# Altium PCB PCB_V1.0.PcbDoc (part 1 of 3)
Units mil, origin at the board's own origin, x right, y up, seen from the top; angles counter-clockwise.
Board outline 2770.03 x 1450.03 mil, 4 copper layers (Layer 1(SIG), Layer 2(GND), Layer 3(GND), Layer 4(SIG)), stack 61.581 mil thick; 51 components, 42 nets, 232 pads, 371 vias.
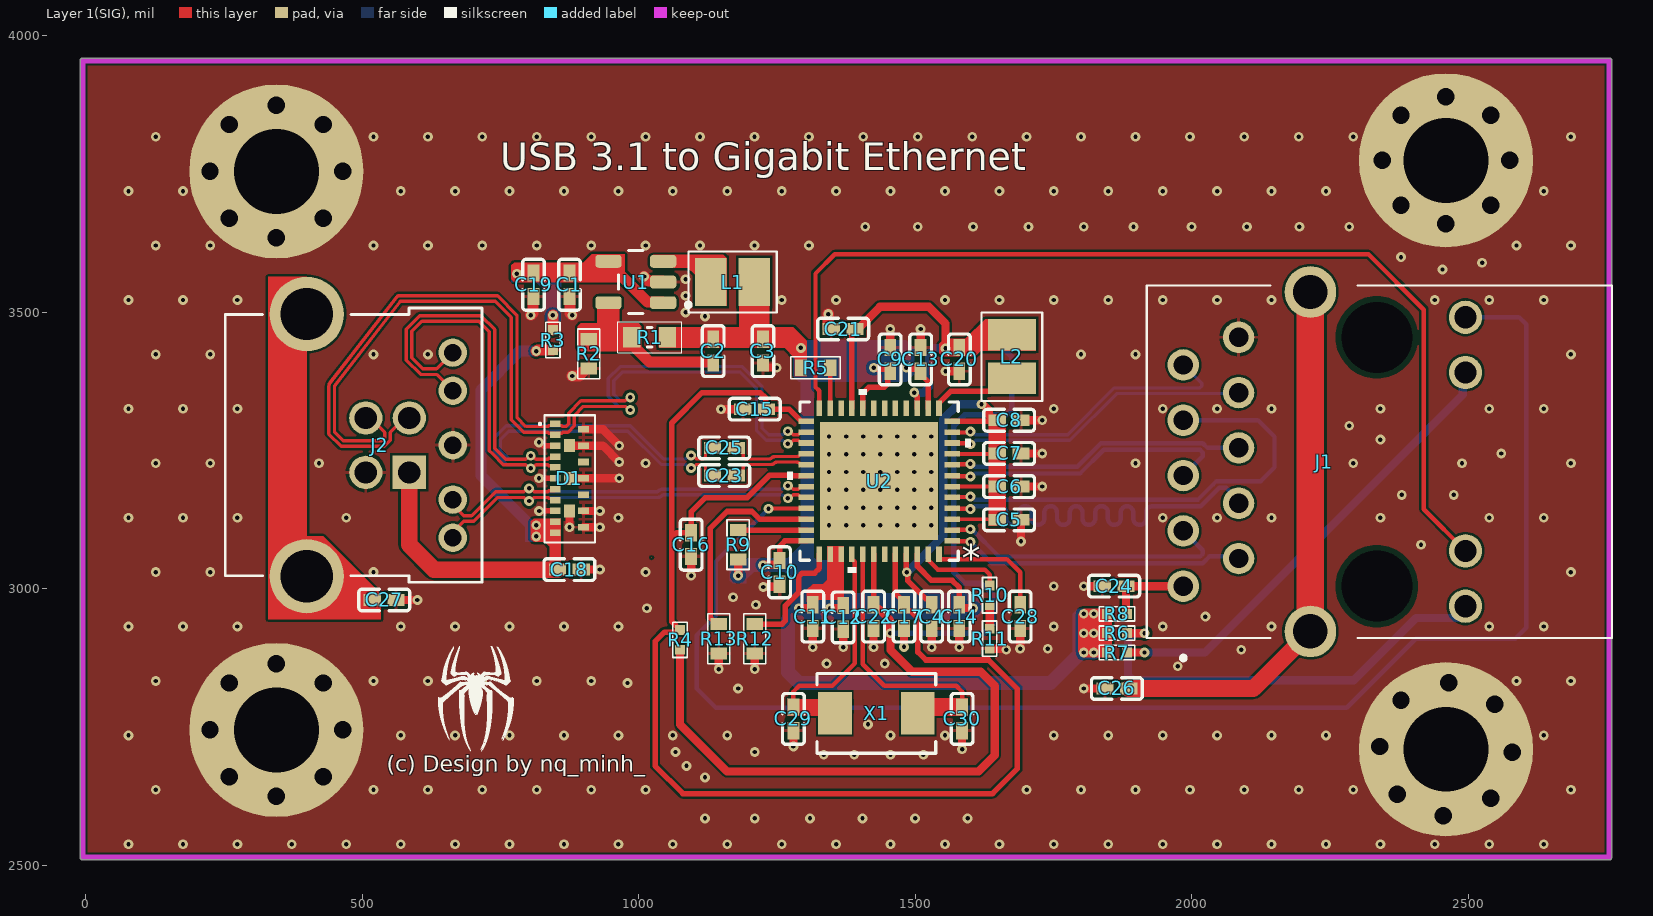
[diagram p0: Layer 1(SIG) view]
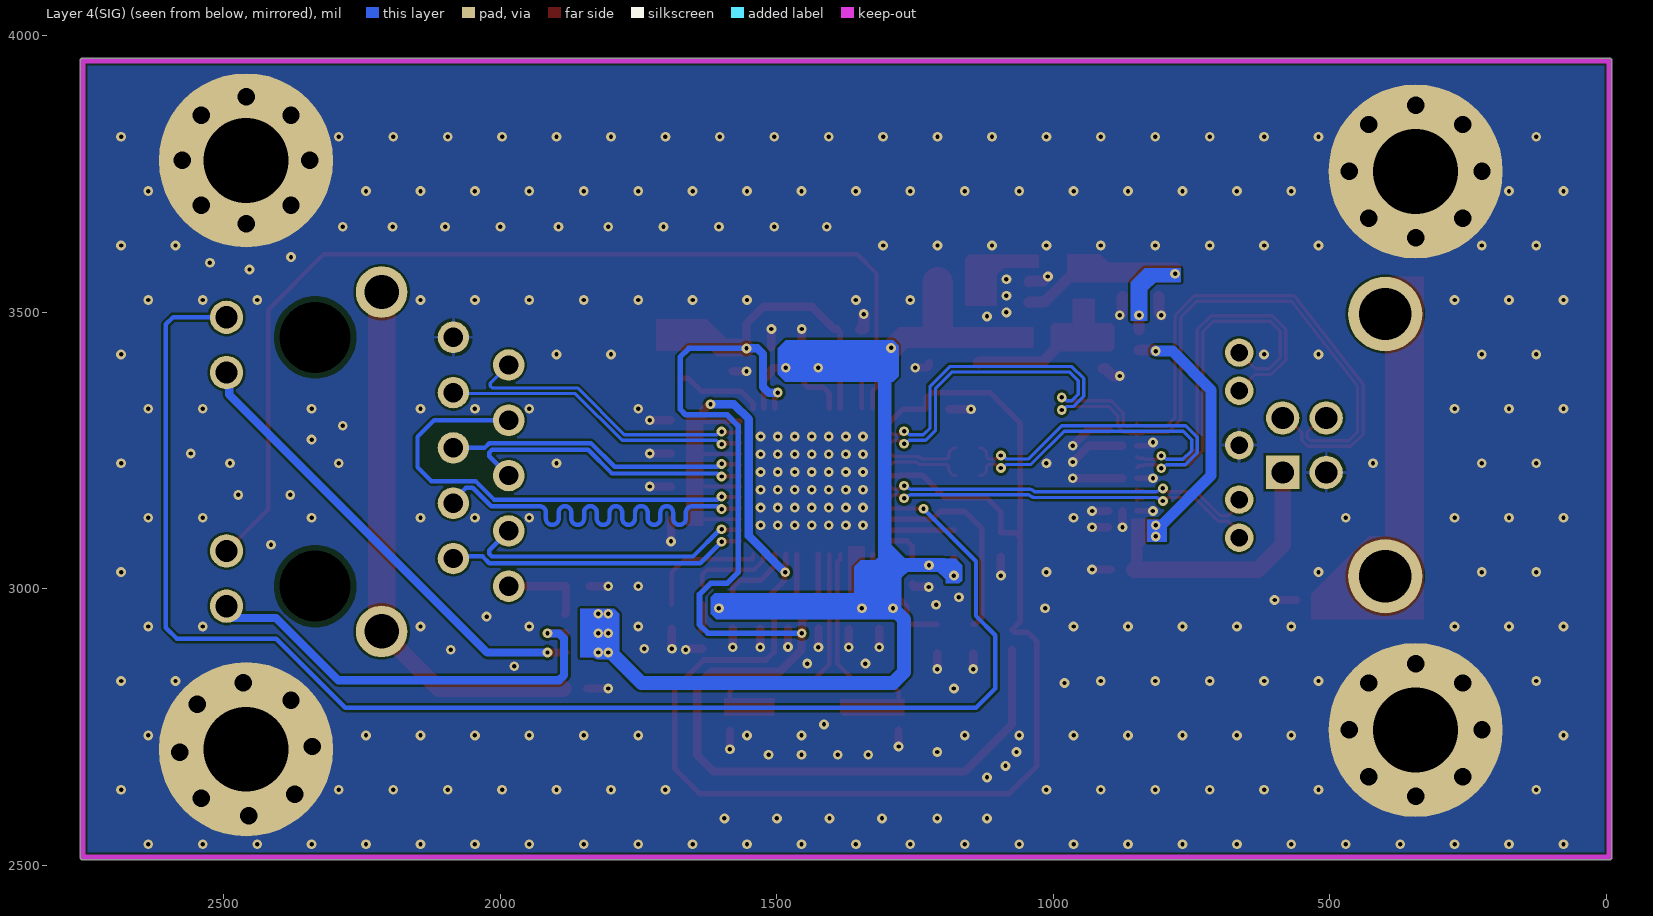
[diagram p1: Layer 4(SIG) view, seen from below]
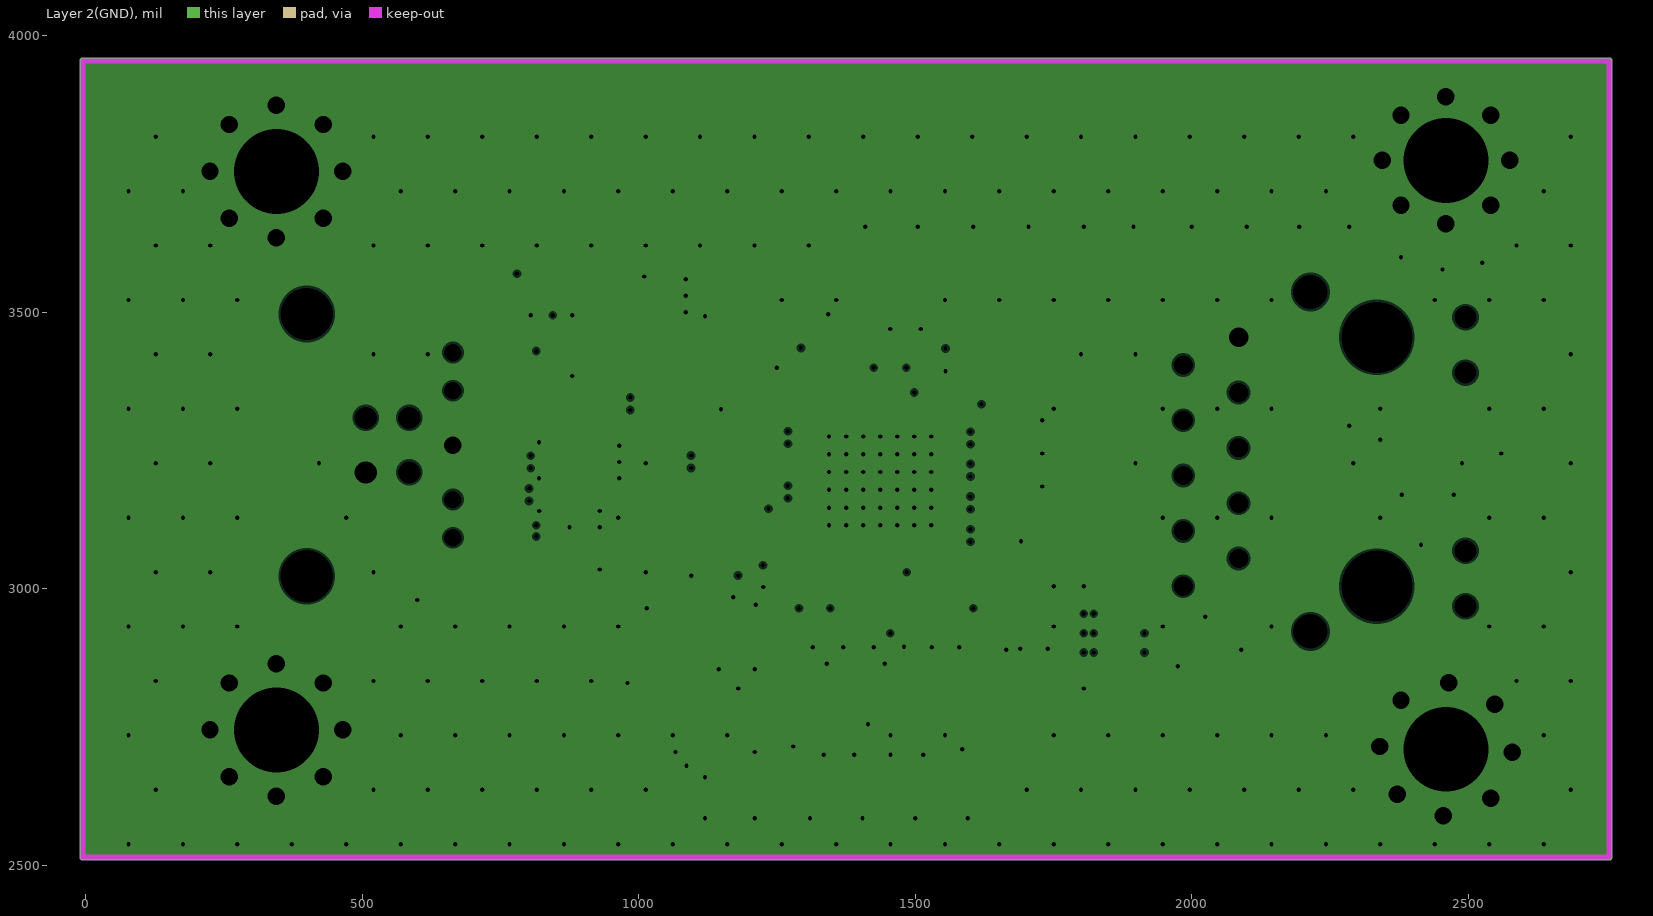
[diagram p2: Layer 2(GND), clearances drawn from the general rule]
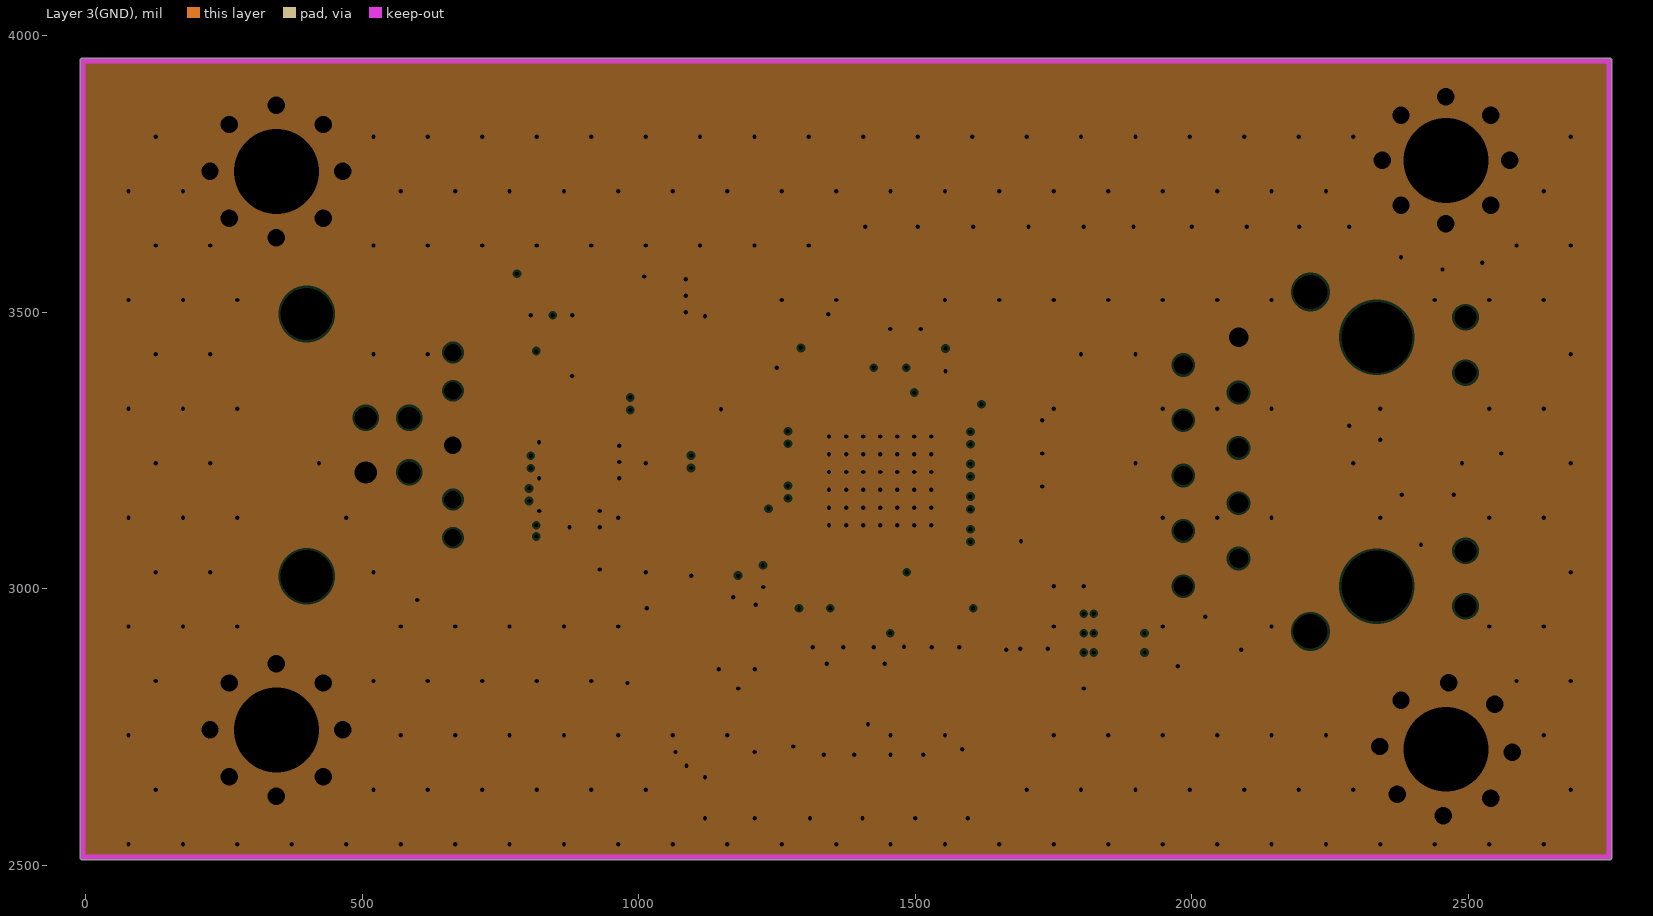
[diagram p3: Layer 3(GND), clearances drawn from the general rule]
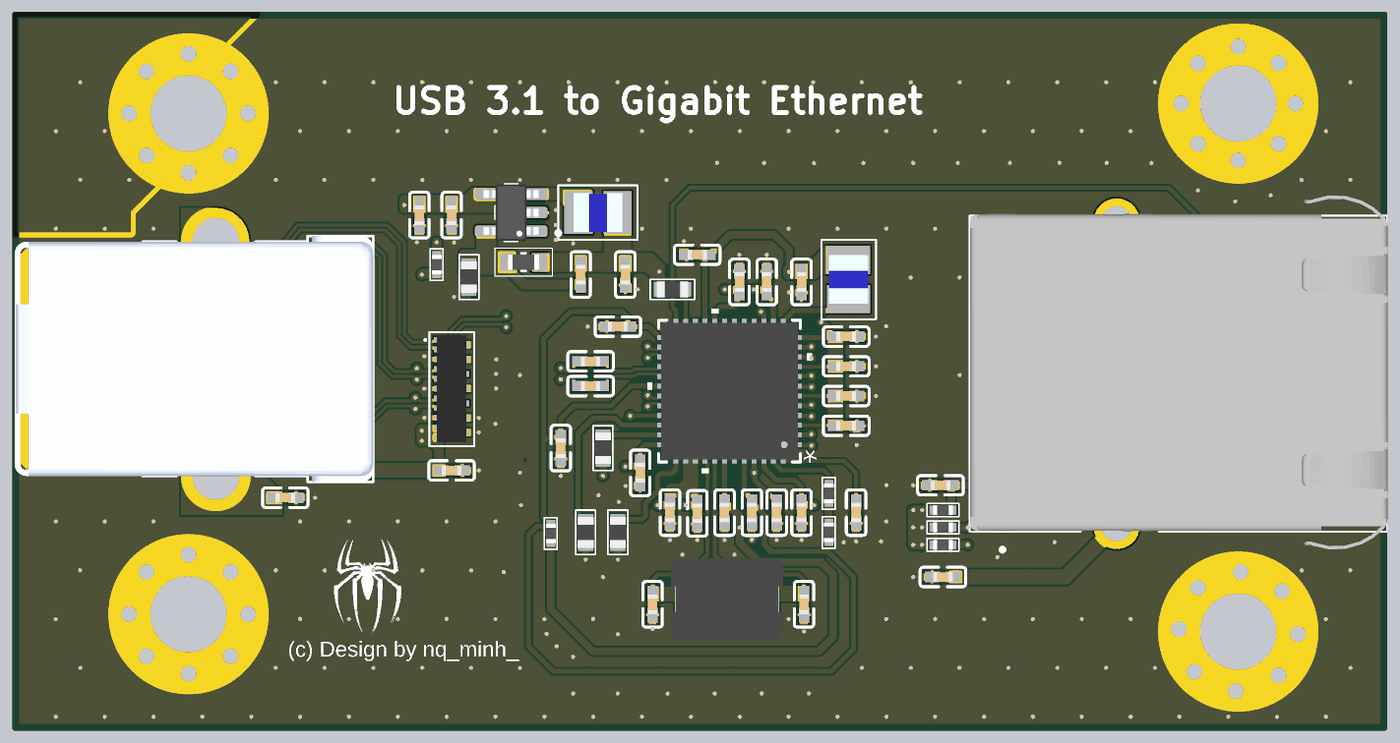
[diagram p4: 3D render of the assembled board from above, using the file's embedded part models]

## Layer stack, top to bottom
Top Solder: solder mask 1, SM-001, Dk 4
Layer 1(SIG): signal copper 1.378
PP1: prepreg 3.913, 3313, Dk 4.1
Layer 2(GND): plane copper 0.598, net GND
C1: dielectric 49.803, FR-4, Dk 4.5
Layer 3(GND): plane copper 0.598, net GND
PP2: prepreg 3.913, 3313, Dk 4.1
Layer 4(SIG): signal copper 1.378
Bottom Solder: solder mask 1, SM-001, Dk 4

## Board outline
-5,2509.99 cw(c-5,2515) -10.01,2515 -10.01,3955 cw(c-5,3955) -5,3960.02 2755,3960.02 cw(c2755,3955) 2760.01,3955 2760.01,2515 cw(c2755,2515) 2755,2509.99

## Design rules (kind name [scope] priority, off if disabled: settings)
BoardOutlineClearance [All] p1: gap=7.87 ignorepadtopadclearanceinfootprint=FALSE
Clearance [All] p1: gap=4 ignorepadtopadclearanceinfootprint=FALSE except(5: Arc-Via Track-Via SMDPad-Via THPad-Via Via-Via Via-Fill Via-Poly Via-Region Via-Text; 9.84: Arc-Hole Track-Hole SMDPad-Hole THPad-Hole Via-Hole Fill-Hole Poly-Hole Region-Hole Text-Hole)
ComponentClearance [All] p1: gap=4 collisioncheckmode=3 verticalgap=4 showdistances=TRUE
DiffPairsRouting DiffPairsRoutin_Diff100 [InDifferentialPairClass('Diff_100')] p1: maxlimit=20 minlimit=4 mostfreqgap=4 toplayer_minwidth=4 toplayer_maxwidth=71497.94 toplayer_prefwidth=4 bottomlayer_minwidth=4 bottomlayer_maxwidth=71497.94 bottomlayer_prefwidth=4 maxuncoupledlength=500
DiffPairsRouting DiffPairsRoutin_Diff50 [InDifferentialPairClass('Diff_50')] p2: maxlimit=20 minlimit=4 mostfreqgap=4 toplayer_minwidth=4 toplayer_maxwidth=71497.94 toplayer_prefwidth=4 bottomlayer_minwidth=4 bottomlayer_maxwidth=71497.94 bottomlayer_prefwidth=4 maxuncoupledlength=500
Height [All] p1: minheight=0 maxheight=71497.94 prefheight=500
HoleSize [All] p1: absolutevalues=TRUE maxlimit=248.03 minlimit=7.87 maxpercent=80.000 minpercent=20.000
HoleToHoleClearance [All] p1: gap=9.84 allowstackedmicrovias=FALSE
MinimumAnnularRing [All] p1: minimumring=3
MinimumSolderMaskSliver [All] p1: minsoldermaskwidth=0
PlaneClearance [All] p1: clearance=4
PlaneConnect PlaneConnectPowerPads [InPadClass('PowerPads')] p1: planeconnectstyle=Direct reliefexpansion=20 reliefentries=4 reliefconductorwidth=10 reliefairgap=10
PlaneConnect [All] p2: planeconnectstyle=Direct reliefexpansion=11.81 reliefentries=4 reliefconductorwidth=4 reliefairgap=4
PolygonConnect PolygonConnectPowerPads [All vs (InPadClass('PowerPads'))] p1: connectstyle=Direct reliefconductorwidth=10 reliefentries=4 polygonreliefangle="90 Angle" airgapwidth=10
PolygonConnect [All] p2: thpad.connectstyle=Relief thpad.reliefconductorwidth=6 thpad.reliefentries=4 thpad.polygonreliefangle="90 Angle" thpad.airgapwidth=6 smdpad.connectstyle=Relief smdpad.reliefconductorwidth=6 smdpad.reliefentries=4 smdpad.polygonreliefangle="90 Angle" smdpad.airgapwidth=6 via.connectstyle=Direct via.reliefconductorwidth=5 via.reliefentries=4 via.polygonreliefangle="90 Angle" via.airgapwidth=5
RoutingVias [All] p1: holewidth=7.87 width=17.72 viastyle="Through Hole" minholewidth=7.87 minwidth=17.72 maxholewidth=248.03 maxwidth=257.87
SilkToSilkClearance [All] p1: silktosilkclearance=0
SilkToSolderMaskClearance [IsPad] p1: minsilkscreentomaskgap=4 clearancetoexposedcopper=TRUE
SolderMaskExpansion [All] p1: expansion=2.95 istentingtop=FALSE
SupplyNets "Schematic Supply Nets_8" [InNet('GND')] p1: voltage=0.000
SupplyNets "Schematic Supply Nets_7" [InNet('+VBUSF')] p2: voltage=0.000
SupplyNets "Schematic Supply Nets_6" [InNet('+2V5')] p3: voltage=0.000
SupplyNets "Schematic Supply Nets_5" [InNet('+1V2')] p4: voltage=0.000
SupplyNets "Schematic Supply Nets_4" [InNet('+3V3')] p5: voltage=0.000
SupplyNets "Schematic Supply Nets_3" [InNet('+VBUS')] p6: voltage=0.000
SupplyNets "Schematic Supply Nets_2" [InNet('GND_E')] p7: voltage=0.000
SupplyNets "Schematic Supply Nets_1" [InNet('+1V2A')] p8: voltage=0.000
SupplyNets "Schematic Supply Nets" [InNet('GND_U')] p9: voltage=0.000
Width [All] p1: maxlimit=71497.94 minlimit=4 preferedwidth=4
20 further rules are at their usual default settings.

## Classes and differential pairs
differential pair class Diff_50: USB_D USB_RX USB_TX USB_TXC
differential pair class Diff_100: MDI_TR0 MDI_TR1 MDI_TR2 MDI_TR3
differential pair MDI_TR3: +MDI_TR3_P -MDI_TR3_N
differential pair MDI_TR2: +MDI_TR2_P -MDI_TR2_N
differential pair MDI_TR1: +MDI_TR1_P -MDI_TR1_N
differential pair MDI_TR0: +MDI_TR0_P -MDI_TR0_N
differential pair USB_TX: +USB_TX_P -USB_TX_N
differential pair USB_TXC: +USB_TXC_P -USB_TXC_N
differential pair USB_RX: +USB_RX_P -USB_RX_N
differential pair USB_D: +USB_D_P -USB_D_N

## Components (designator, comment, footprint, x,y, rotation, side; value= is the part's Value field where it differs from the comment)
C1 "22µF" C0402 875,3550 r90 top
C2 "12pF" C0402 1135,3430 r90 top
C3 "22µF" C0402 1225,3430 r90 top
C4 "1µF" C0402 1530,2950 r270 top
C5 "1µF" C0402 1670,3125 r180 top
C6 "1µF" C0402 1670,3185 r180 top
C7 "1µF" C0402 1670,3245 r180 top
C8 "1µF" C0402 1670,3305 r180 top
C9 "1µF" C0402 1455,3415 r90 top
C10 "1µF" C0402 1255,3030 r270 top
C11 "1µF" C0402 1315,2950 r270 top
C12 "1µF" C0402 1370,2948.54 r270 top
C13 "22µF" C0402 1510,3415 r270 top
C14 "1µF" C0402 1580,2950 r270 top
C15 "1µF" C0402 1210,3325 r180 top
C16 "1µF" C0402 1095,3080 r270 top
C17 "1µF" C0402 1480,2950 r270 top
C18 "1µF" C0402 875,3035 r180 top
C19 "1µF" C0402 810,3550 r90 top
C20 "22µF" C0402 1580,3415 r90 top
C21 "1µF" C0402 1370,3470 r180 top
C22 "1µF" C0402 1425,2950 r270 top
C23 "100nF" C0402 1155,3205 r0 top
C24 "1µF" C0402 1860,3005 r180 top
C25 "100nF" C0402 1155,3255 r0 top
C26 "220pF" C0402 1865,2820 r0 top
C27 "220pF" C0402 540,2980 r180 top
C28 "1µF" C0402 1690,2950 r270 top
C29 "12pF" C0402 1280,2765 r90 top
C30 "12pF" C0402 1585,2765 r90 top
D1 "ESD7008MUTAG" ESD7008MUTAG 875,3200 r270 top value=150fF
J1 "93626-3006" 936263006 1985,3005 r90 top
J2 "GSB4211311WEU" AMPHENOL_GSB4211311WEU 400,3260 r270 top locked
L1 "4.7µH" INDC2520X100N 1170,3555 r0 top
L2 "4.7µH" INDC2520X100N 1675,3420 r90 top
R1 "53.6kΩ" RESC1608X55N 1020,3455 r0 top
R2 "12kΩ" RC0603N_YAG-L 910,3425 r90 top
R3 "0Ω" RC0402N_YAG-L 845,3450 r90 top
R4 "0Ω" RC0402N_YAG-L 1075.04,2908 r90 top
R5 "12kΩ" RC0603N_YAG-L 1320,3400 r180 top
R6 "1kΩ" RC0402N_YAG-L 1865,2920 r180 top
R7 "1kΩ" RC0402N_YAG-L 1865,2885 r180 top
R8 "0Ω" RC0402N_YAG-L 1865,2955 r180 top
R9 "12kΩ" RC0603N_YAG-L 1180,3080 r270 top
R10 "1kΩ" RC0402N_YAG-L 1635,2988.54 r90 top
R11 "1kΩ" RC0402N_YAG-L 1635,2910 r90 top
R12 "12kΩ" RC0603N_YAG-L 1210,2910 r270 top
R13 "12kΩ" RC0603N_YAG-L 1145,2910 r270 top
U1 "TLV62568DBVR" SOT95P280X145-5N 995,3555 r180 top
U2 "LAN7800-I/Y9X 48-Pin VQFN EP Tray" SQFN48_7X7_Y9X_MCH-L 1435,3195 r180 top
X1 "ABM3-25.000MHZ-D2Y-T 25Mhz" XTAL_ABM3_ABR-L 1430,2775 r0 top

## Footprints (in the part's own frame and the unit in brackets; to place one, negate y for a bottom-side part, rotate by r counter-clockwise, add the part's x,y. Pads: shape width x height; smd on the part's side, far side on the other; paste and mask are expansions set on the pad)
936263006 [mm]
  round 1.446 hole 0.89: 1(0,0) 2(1.27,-2.54) 3(2.54,0) 4(3.81,-2.54) 5(5.08,0) 6(6.35,-2.54) 7(7.62,0) 8(8.89,-2.54) 9(10.16,0) 10(11.43,-2.54)
  round 1.53 hole 1.02: 11(-0.92,-12.96) 12(1.62,-12.96) 13(9.81,-12.96) 14(12.35,-12.96)
  round 2.37 hole 1.58: MH1(-2.08,-5.84) MH2(13.51,-5.84)
  round 1.63 hole 3.26 unplated: MH3(11.43,-8.89) MH4(0,-8.89)
  silkscreen extent -3.4,-19.69 13.81,1.68, body extent -3.3,-19.7 14.86,1.67, height 15.2
AMPHENOL_GSB4211311WEU [mm]
  rect 1.53x1.53 / inner round 1.53 / far side rect 1.53x1.53 hole 1.02: 1(1.25,4.71)
  round 1.53 hole 1.02: 2(-1.25,4.71) 3(-1.25,2.71) 4(1.25,2.71)
  round 1.308 hole 0.8: 5(-4.25,6.71) 6(-2.5,6.71) 7(0,6.71) 8(2.5,6.71) 9(4.25,6.71)
  round 3.416 hole 2.4: S1(-6.02,0) S2(6.02,0)
  silkscreen extent -6.3,-3.75 6.3,8.05, body extent -6.3,-10.3 6.3,8.06, height 13.11
C0402 [mm]
  rect 0.79x0.54 smd paste+0 mask+0.051: 1(-0.545,0) 2(0.545,0)
  silkscreen extent -1.17,-0.5 1.17,0.5, body extent -0.5,-0.25 0.5,0.25, height 0.5
ESD7008MUTAG [mm]
  rect 0.3x0.5 smd: 1(-2.5,-0.65) 2(-2,-0.65) 3(-1.5,-0.65) 4(-1,-0.65) 5(-0.5,-0.65) 6(0,-0.65) 7(0.5,-0.65) 8(1,-0.65) 9(1.5,-0.65) 10(2,-0.65) 11(2.5,-0.65) 12(2.25,0.65) 13(1.5,0.65) 14(0.75,0.65) 15(0,0.65) 16(-0.75,0.65) 17(-1.5,0.65) 18(-2.25,0.65)
  rect 0.6x0.5 smd: 19(-1.5,0) 20(0,0) 21(1.5,0)
  silkscreen extent -2.9,-1.4 2.95,1.17, body extent -2.75,-0.76 2.75,0.76, height 0.51
INDC2520X100N [mm]
  rect 1.45x2.2 smd: 1(-1,0) 2(1,0)
  silkscreen extent -2.03,-1.4 2.03,1.4, body extent -1.25,-1 1.25,1, height 1
RC0402N_YAG-L [mil]
  rect 18x18 smd paste+0 mask+0: 1(-18,0) 2(18,0)
  silkscreen extent -32,-13 32,13, body extent -20,-10 20,10, height 14
RC0603N_YAG-L [mil]
  rect 22x30 smd paste+0 mask+0: 1(-26.5,0) 2(26.5,0)
  silkscreen extent -45,-20 45,20, body extent -31,-16 31,16, height 28
RESC1608X55N [mm]
  rect 0.79x0.93 smd paste+0 mask+0.102: 1(-0.82,0) 2(0.82,0)
  silkscreen extent -1.47,-0.71 1.47,0.71, body extent -0.8,-0.4 0.8,0.4, height 0.55
SOT95P280X145-5N [mm]
  rrect50% 1.21x0.59 smd: 1(-1.255,0.95) 2(-1.255,0) 3(-1.255,-0.95) 4(1.255,-0.95) 5(1.255,0.95)
  silkscreen extent -2.51,-1.45 0.8,1.45, body extent -1.4,-1.45 1.4,1.45, height 1.45
SQFN48_7X7_Y9X_MCH-L [mil]
  rect 28x10 smd paste+0 mask+0: 1(-132,108.27) 2(-132,88.58) 3(-132,68.9) 4(-132,49.21) 5(-132,29.53) 6(-132,9.84) 7(-132,-9.84) 8(-132,-29.53) 9(-132,-49.21) 10(-132,-68.9) 11(-132,-88.58) 12(-132,-108.27) 25(132,-108.27) 26(132,-88.58) 27(132,-68.9) 28(132,-49.21) 29(132,-29.53) 30(132,-9.84) 31(132,9.84) 32(132,29.53) 33(132,49.21) 34(132,68.9) 35(132,88.58) 36(132,108.27)
  rect 10x28 smd paste+0 mask+0: 13(-108.27,-132) 14(-88.58,-132) 15(-68.9,-132) 16(-49.21,-132) 17(-29.53,-132) 18(-9.84,-132) 19(9.84,-132) 20(29.53,-132) 21(49.21,-132) 22(68.9,-132) 23(88.58,-132) 24(108.27,-132) 37(108.27,132) 38(88.58,132) 39(68.9,132) 40(49.21,132) 41(29.53,132) 42(9.84,132) 43(-9.84,132) 44(-29.53,132) 45(-49.21,132) 46(-68.9,132) 47(-88.58,132) 48(-108.27,132)
  rect 213x213 smd paste-106.5 mask+0: 49(0,0)
  silkscreen extent -166,-166 166,166, body extent -138,-138 138,138, height 39
XTAL_ABM3_ABR-L [mil]
  rect 61x77 smd paste+0 mask+0: 1(-75,0) 2(75,0)
  silkscreen extent -108,-72 108,72, body extent -113,-82 113,82, height 51

## Part data
C1 C3 C13 C20: library part C0402_MLCC_22uF_X5R_6.3V, "6.3V 22uF X5R ±20% 0402 Multilayer Ceramic Capacitors MLCC - SMD/SMT ROHS", Case/Package=0402, Dielectric=X5R, Dielectric Material=Ceramic, LCSC Part=C415703, Manufacturer=Murata, Manufacturer Part Number=GRM155R60J226ME11D, Max Operating Temperature=85°C, Min Operating Temperature=-55°C, Supplier Part Number=490-GRM155R60J226ME11DDKR-ND, Tolerance=20%, Voltage Rating (DC)=6.3V, Category="Ceramic Capacitors", ComponentLink1Description=https://datasheet.octopart.com:443/GRM155R60J226ME11D-Murata-datasheet-165579666.pdf?src-supplier=TME, ComponentLink1URL=https://datasheet.octopart.com:443/GRM155R60J226ME11D-Murata-datasheet-165579666.pdf?src-supplier=TME, ComponentLink2Description=https://datasheet.octopart.com:443/GRM155R60J226ME11D-Murata-datasheet-102370999.pdf?src-supplier=HQonline, ComponentLink2URL=https://datasheet.octopart.com:443/GRM155R60J226ME11D-Murata-datasheet-102370999.pdf?src-supplier=HQonline, ComponentLink3Description=https://datasheet.octopart.com/GRM155R60J226ME11D-Murata-datasheet-12515295.pdf, ComponentLink3URL=https://datasheet.octopart.com/GRM155R60J226ME11D-Murata-datasheet-12515295.pdf, ComponentLink4Description=https://datasheet.octopart.com/GRM155R60J226ME11D-Murata-datasheet-12510076.pdf, ComponentLink4URL=https://datasheet.octopart.com/GRM155R60J226ME11D-Murata-datasheet-12510076.pdf, ComponentLink5Description=https://datasheet.octopart.com/GRM155R60J226ME11D-Murata-datasheet-11978611.pdf, ComponentLink5URL=https://datasheet.octopart.com/GRM155R60J226ME11D-Murata-datasheet-11978611.pdf, ComponentLink6Description=https://datasheet.octopart.com/GRM155R60J226ME11D-Murata-datasheet-10025737.pdf, ComponentLink6URL=https://datasheet.octopart.com/GRM155R60J226ME11D-Murata-datasheet-10025737.pdf, ComponentLink7Description=https://datasheet.octopart.com/GRM155R60J226ME11D-Murata-datasheet-8819587.pdf, ComponentLink7URL=https://datasheet.octopart.com/GRM155R60J226ME11D-Murata-datasheet-8819587.pdf, ComponentLink8Description=http://sigma.octopart.com:80/reach_statement/Murata-company-16.pdf?src-supplier=Compliance+Statements, ComponentLink8URL=http://sigma.octopart.com:80/reach_statement/Murata-company-16.pdf?src-supplier=Compliance+Statements, Height=500µm, Length=1mm, Lifecycle Status=Production, Mounting Technology="Surface Mount", Number of Terminals=2, Pricing="1=0,29, 10=0,172, 50=0,125, 100=0,1106, 500=0,08622, 1000=0,0787, 2500=0,07077, 5000=0,06599 (USD)", REACH SVHC=Yes, RoHS=Compliant, Stock=5573, Supplier=DigiKey, Thickness=500µm, Width=500µm
C2 C29 C30: library part C0402_MLCC_12pF_c0G_50V, "50V 12pF C0G ±1% 0402 Multilayer Ceramic Capacitors MLCC - SMD/SMT ROHS", Case/Package=0402, Dielectric Material=Ceramic, LCSC Part=C393682, Manufacturer=Murata, Manufacturer Lifecycle Status="IN PRODUCTION", Manufacturer Part Number=GCM1555C1H120FA16D, Max Operating Temperature=125°C, Min Operating Temperature=-55°C, Ratings=AEC-Q200, Supplier Part Number=490-16460-1-ND, Temperature Coefficient=30ppm/°C, Voltage Rating=50V, Category="Ceramic Capacitors", ComponentLink1Description=https://datasheet.octopart.com:443/GCM1555C1H120FA16D-Murata-datasheet-149522307.pdf?src-supplier=Newark, ComponentLink1URL=https://datasheet.octopart.com:443/GCM1555C1H120FA16D-Murata-datasheet-149522307.pdf?src-supplier=Newark, ComponentLink2Description=https://datasheet.octopart.com:443/GCM1555C1H120FA16D-Murata-datasheet-141265818.pdf?src-supplier=Geoflip, ComponentLink2URL=https://datasheet.octopart.com:443/GCM1555C1H120FA16D-Murata-datasheet-141265818.pdf?src-supplier=Geoflip, ComponentLink3Description=https://datasheet.octopart.com:443/GCM1555C1H120FA16D-Murata-datasheet-140655927.pdf?src-supplier=Ciiva, ComponentLink3URL=https://datasheet.octopart.com:443/GCM1555C1H120FA16D-Murata-datasheet-140655927.pdf?src-supplier=Ciiva, ComponentLink4Description=https://datasheet.octopart.com:443/GCM1555C1H120FA16D-Murata-datasheet-138715618.pdf?src-supplier=Ciiva, ComponentLink4URL=https://datasheet.octopart.com:443/GCM1555C1H120FA16D-Murata-datasheet-138715618.pdf?src-supplier=Ciiva, ComponentLink5Description=https://datasheet.octopart.com:443/GCM1555C1H120FA16D-Murata-datasheet-12511495.pdf?src-supplier=TME, ComponentLink5URL=https://datasheet.octopart.com:443/GCM1555C1H120FA16D-Murata-datasheet-12511495.pdf?src-supplier=TME, ComponentLink6Description=http://sigma.octopart.com:80/reach_statement/Murata-company-16.pdf?src-supplier=Compliance+Statements, ComponentLink6URL=http://sigma.octopart.com:80/reach_statement/Murata-company-16.pdf?src-supplier=Compliance+Statements, Export Control Classification Number (ECCN) Code=EAR99, Harmonized Tariff Schedule (HTS) Code=8532.24.00.20, Height=500µm, Introduction Date=2013-11-20, Length=1mm, Lifecycle Status=Production, Material=Ceramic, Mounting Technology="Surface Mount", Number of Terminals=2, Pricing="1=0,1, 10=0,039, 50=0,0262, 100=0,0225, 500=0,01612, 1000=0,01418, 2500=0,01214, 5000=0,01092 (USD)", REACH SVHC=Yes, RoHS=Compliant, Schedule B="8532240020, 8532240020|8532240020|8532240020|8532240020|8532240020", Stock=94279, Supplier=DigiKey, Thickness=500µm, Voltage Rating (DC)=50V, Width=500µm
C4 C5 C6 C7 C8 C9 C10 C11 C12 C14 C15 C16 C17 C18 C19 C21 C22 C24 C28: library part C0402_MLCC_1uF_X5R_50V, "Ceramic Capacitor, Multilayer, Ceramic, 50V, 10% +Tol, 10% -Tol, X5R, 1uF, Surface Mount, 0402", Case/Package=0402, Dielectric=X5R, Dielectric Material=Ceramic, LCSC Part=C1518208, Manufacturer=Murata, Manufacturer Lifecycle Status="IN PRODUCTION", Manufacturer Part Number=GRM155R61H105KE05D, Max Operating Temperature=85°C, Min Operating Temperature=-55°C, Supplier Part Number=490-GRM155R61H105KE05DDKR-ND, Tolerance=10%, Voltage Rating=50V, Category="Ceramic Capacitors", ComponentLink1Description=https://datasheet.octopart.com:443/GRM155R61H105KE05D-Murata-datasheet-155239061.pdf?src-supplier=Newark, ComponentLink1URL=https://datasheet.octopart.com:443/GRM155R61H105KE05D-Murata-datasheet-155239061.pdf?src-supplier=Newark, ComponentLink2Description=https://datasheet.octopart.com:443/GRM155R61H105KE05D-Murata-datasheet-165579666.pdf?src-supplier=TME, ComponentLink2URL=https://datasheet.octopart.com:443/GRM155R61H105KE05D-Murata-datasheet-165579666.pdf?src-supplier=TME, ComponentLink3Description=https://datasheet.octopart.com:443/GRM155R61H105KE05D-Murata-datasheet-192320400.pdf?src-supplier=HQonline, ComponentLink3URL=https://datasheet.octopart.com:443/GRM155R61H105KE05D-Murata-datasheet-192320400.pdf?src-supplier=HQonline, ComponentLink4Description=https://datasheet.octopart.com:443/GRM155R61H105KE05D-Murata-datasheet-141266224.pdf?src-supplier=Ciiva, ComponentLink4URL=https://datasheet.octopart.com:443/GRM155R61H105KE05D-Murata-datasheet-141266224.pdf?src-supplier=Ciiva, ComponentLink5Description=https://datasheet.octopart.com:443/GRM155R61H105KE05D-Murata-datasheet-140690632.pdf?src-supplier=Ciiva, ComponentLink5URL=https://datasheet.octopart.com:443/GRM155R61H105KE05D-Murata-datasheet-140690632.pdf?src-supplier=Ciiva, ComponentLink6Description=https://datasheet.octopart.com:443/GRM155R61H105KE05D-Murata-datasheet-138740814.pdf?src-supplier=Ciiva, ComponentLink6URL=https://datasheet.octopart.com:443/GRM155R61H105KE05D-Murata-datasheet-138740814.pdf?src-supplier=Ciiva, ComponentLink7Description=https://datasheet.octopart.com/GRM155R61H105KE05D-Murata-datasheet-12515295.pdf, ComponentLink7URL=https://datasheet.octopart.com/GRM155R61H105KE05D-Murata-datasheet-12515295.pdf, ComponentLink8Description=https://datasheet.octopart.com/GRM155R61H105KE05D-Murata-datasheet-12510076.pdf, ComponentLink8URL=https://datasheet.octopart.com/GRM155R61H105KE05D-Murata-datasheet-12510076.pdf, ComponentLink9Description=https://datasheet.octopart.com/GRM155R61H105KE05D-Murata-datasheet-11978611.pdf, ComponentLink9URL=https://datasheet.octopart.com/GRM155R61H105KE05D-Murata-datasheet-11978611.pdf, ComponentLink10Description=https://datasheet.octopart.com/GRM155R61H105KE05D-Murata-datasheet-10025737.pdf, ComponentLink10URL=https://datasheet.octopart.com/GRM155R61H105KE05D-Murata-datasheet-10025737.pdf, ComponentLink11Description=https://datasheet.octopart.com/GRM155R61H105KE05D-Murata-datasheet-8819587.pdf, ComponentLink11URL=https://datasheet.octopart.com/GRM155R61H105KE05D-Murata-datasheet-8819587.pdf, ComponentLink12Description=http://sigma.octopart.com:80/reach_statement/Murata-company-16.pdf?src-supplier=Compliance+Statements, ComponentLink12URL=http://sigma.octopart.com:80/reach_statement/Murata-company-16.pdf?src-supplier=Compliance+Statements, Export Control Classification Number (ECCN) Code=EAR99, Harmonized Tariff Schedule (HTS) Code=8532.24.00.20, Height=500µm, Introduction Date=2020-01-27, Length=1mm, Lifecycle Status=Production, Material=Ceramic, Mounting Technology="Surface Mount", Number of Terminals=2, Pricing="1=0,1, 10=0,056, 50=0,0382, 100=0,0329, 500=0,0241, 1000=0,02139, 2500=0,01854, 5000=0,01683 (USD)", REACH SVHC=Yes, RoHS=Compliant, Stock=2290440, Supplier=DigiKey, Thickness=500µm, Voltage Rating (DC)=50V, Width=500µm
C23 C25: library part C0402_MLCC_100nF_X7R_50V, "50V 100nF X7R ±10% 0402 Multilayer Ceramic Capacitors MLCC - SMD/SMT ROHS", Case/Package=0402, Dielectric=X7R, Dielectric Material=Ceramic, LCSC Part=C131394, Manufacturer="Yageo Group", Manufacturer Part Number=CC0402KRX7R9BB104, Max Operating Temperature=125°C, Min Operating Temperature=-55°C, Supplier Part Number=311-3566-6-ND, Temperature Coefficient=30ppm/°C, Tolerance=10%, Voltage Rating=50V, Category="Ceramic Capacitors", China RoHS=Compliant, ComponentLink1Description=https://datasheet.octopart.com:443/CC0402KRX7R9BB104-Yageo-datasheet-177165144.pdf?src-supplier=IHS, ComponentLink1URL=https://datasheet.octopart.com:443/CC0402KRX7R9BB104-Yageo-datasheet-177165144.pdf?src-supplier=IHS, ComponentLink2Description=https://datasheet.octopart.com:443/CC0402KRX7R9BB104-Yageo-datasheet-78855684.pdf?src-supplier=Upverter, ComponentLink2URL=https://datasheet.octopart.com:443/CC0402KRX7R9BB104-Yageo-datasheet-78855684.pdf?src-supplier=Upverter, ComponentLink3Description=https://datasheet.octopart.com:443/CC0402KRX7R9BB104-Yageo-datasheet-181967451.pdf?src-supplier=Newark, ComponentLink3URL=https://datasheet.octopart.com:443/CC0402KRX7R9BB104-Yageo-datasheet-181967451.pdf?src-supplier=Newark, ComponentLink4Description=https://datasheet.octopart.com:443/CC0402KRX7R9BB104-Yageo-datasheet-140260305.pdf?src-supplier=Newark, ComponentLink4URL=https://datasheet.octopart.com:443/CC0402KRX7R9BB104-Yageo-datasheet-140260305.pdf?src-supplier=Newark, ComponentLink5Description=https://datasheet.octopart.com:443/CC0402KRX7R9BB104-Yageo-datasheet-147453679.pdf?src-supplier=Farnell, ComponentLink5URL=https://datasheet.octopart.com:443/CC0402KRX7R9BB104-Yageo-datasheet-147453679.pdf?src-supplier=Farnell, ComponentLink6Description=https://datasheet.octopart.com/CC0402KRX7R9BB104-Yageo-datasheet-10883670.pdf, ComponentLink6URL=https://datasheet.octopart.com/CC0402KRX7R9BB104-Yageo-datasheet-10883670.pdf, ComponentLink7Description=https://datasheet.octopart.com/Surface-Mount-Ceramic-Multilayer-Capacitors%3B-General-Purpose-%26-High-Capacitance-Class-2%2C-X7R-Yageo-datasheet-family-114.pdf, ComponentLink7URL=https://datasheet.octopart.com/Surface-Mount-Ceramic-Multilayer-Capacitors%3B-General-Purpose-%26-High-Capacitance-Class-2%2C-X7R-Yageo-datasheet-family-114.pdf, ComponentLink8Description=https://datasheet.octopart.com:443/CC0402KRX7R9BB104-Yageo-datasheet-166511530.pdf?src-supplier=Future+Electronics, ComponentLink8URL=https://datasheet.octopart.com:443/CC0402KRX7R9BB104-Yageo-datasheet-166511530.pdf?src-supplier=Future+Electronics, ComponentLink9Description=https://datasheet.octopart.com:443/CC0402KRX7R9BB104-Yageo-datasheet-137700082.pdf?src-supplier=Future+Electronics, ComponentLink9URL=https://datasheet.octopart.com:443/CC0402KRX7R9BB104-Yageo-datasheet-137700082.pdf?src-supplier=Future+Electronics, ComponentLink10Description=https://datasheet.octopart.com:443/CC0402KRX7R9BB104-Yageo-datasheet-137700084.pdf?src-supplier=Future+Electronics, ComponentLink10URL=https://datasheet.octopart.com:443/CC0402KRX7R9BB104-Yageo-datasheet-137700084.pdf?src-supplier=Future+Electronics, ComponentLink11Description=https://datasheet.octopart.com:443/CC0402KRX7R9BB104-Yageo-datasheet-42079887.pdf?src-supplier=Future+Electronics, ComponentLink11URL=https://datasheet.octopart.com:443/CC0402KRX7R9BB104-Yageo-datasheet-42079887.pdf?src-supplier=Future+Electronics, ComponentLink12Description=https://datasheet.octopart.com:443/CC0402KRX7R9BB104-Yageo-datasheet-178018857.pdf?src-supplier=Burklin+Elektronik, ComponentLink12URL=https://datasheet.octopart.com:443/CC0402KRX7R9BB104-Yageo-datasheet-178018857.pdf?src-supplier=Burklin+Elektronik, ComponentLink13Description=https://datasheet.octopart.com:443/CC0402KRX7R9BB104-Yageo-Group-datasheet-165992755.pdf?src-supplier=ODG+(Origin+Data+Global), ComponentLink13URL=https://datasheet.octopart.com:443/CC0402KRX7R9BB104-Yageo-Group-datasheet-165992755.pdf?src-supplier=ODG+(Origin+Data+Global), ComponentLink14Description=https://datasheet.octopart.com:443/CC0402KRX7R9BB104-Yageo-datasheet-151948686.pdf?src-supplier=TME, ComponentLink14URL=https://datasheet.octopart.com:443/CC0402KRX7R9BB104-Yageo-datasheet-151948686.pdf?src-supplier=TME, ComponentLink15Description=https://datasheet.octopart.com:443/CC0402KRX7R9BB104-Yageo-datasheet-120101875.pdf?src-supplier=Megastar, ComponentLink15URL=https://datasheet.octopart.com:443/CC0402KRX7R9BB104-Yageo-datasheet-120101875.pdf?src-supplier=Megastar, ComponentLink16Description=http://sigma.octopart.com:80/rohs_statement/Surface-Mount-Ceramic-Multilayer-Capacitors%3B-General-Purpose-%26-High-Capacitance-Class-2%2C-X7R-Yageo-family-124.pdf?src-supplier=Compliance+Statements, ComponentLink16URL=http://sigma.octopart.com:80/rohs_statement/Surface-Mount-Ceramic-Multilayer-Capacitors%3B-General-Purpose-%26-High-Capacitance-Class-2%2C-X7R-Yageo-family-124.pdf?src-supplier=Compliance+Statements, ComponentLink17Description=http://sigma.octopart.com:80/reach_statement/Surface-Mount-Ceramic-Multilayer-Capacitors%3B-General-Purpose-%26-High-Capacitance-Class-2%2C-X7R-Yageo-family-125.pdf?src-supplier=Compliance+Statements, ComponentLink17URL=http://sigma.octopart.com:80/reach_statement/Surface-Mount-Ceramic-Multilayer-Capacitors%3B-General-Purpose-%26-High-Capacitance-Class-2%2C-X7R-Yageo-family-125.pdf?src-supplier=Compliance+Statements, ComponentLink18Description=http://sigma.octopart.com:80/conflict_mineral_statement/Yageo-company-3.pdf?src-supplier=Compliance+Statements, ComponentLink18URL=http://sigma.octopart.com:80/conflict_mineral_statement/Yageo-company-3.pdf?src-supplier=Compliance+Statements, ComponentLink19Description=http://sigma.octopart.com:80/rohs_statement/Yageo-company-2.pdf?src-supplier=Compliance+Statements, ComponentLink19URL=http://sigma.octopart.com:80/rohs_statement/Yageo-company-2.pdf?src-supplier=Compliance+Statements, Halogen Free="Halogen Free", Height=500µm, Lead Free="Lead Free", Length=1mm, Lifecycle Status=Production, Material=Ceramic, Mounting Technology="Surface Mount", Number of Terminals=2, Pricing="1=0,1, 10=0,055, 50=0,0382, 100=0,0329, 500=0,02408, 1000=0,02136, 2500=0,01852, 5000=0,01681 (USD)", REACH SVHC=Yes, RoHS=Compliant, Schedule B="8532240020, 8532240020|8532240020, 8532240020|8532240020|8532240020, 8532240020|8532240020|8532240020|8532240020", Stock=2445691, Supplier=DigiKey, Thickness=558.8µm, Voltage Rating (DC)=50V, Width=500µm
C26 C27: library part C0402_MLCC_220pF_C0G_50V, "50V 220pF C0G ±5% 0402 Multilayer Ceramic Capacitors MLCC - SMD/SMT ROHS", Case Code (Imperial)=0402, Case Code (Metric)=1005, Dielectric=C0G, Dielectric Material=Ceramic, Insulation Resistance=10GΩ, LCSC Part=C71693, Manufacturer=Murata, Manufacturer Lifecycle Status=NRND, Manufacturer Part Number=GRM1555C1H221JA01D, Max Operating Temperature=125°C, Min Operating Temperature=-55°C, Supplier Part Number=490-1293-6-ND, Temperature Coefficient=30ppm/°C, Tolerance=5%, Voltage=50V, Case/Package=0402, Category="Ceramic Capacitors", ComponentLink1Description=https://datasheet.octopart.com:443/GRM1555C1H221JA01D-Murata-datasheet-501912.pdf?src-supplier=element14+APAC, ComponentLink1URL=https://datasheet.octopart.com:443/GRM1555C1H221JA01D-Murata-datasheet-501912.pdf?src-supplier=element14+APAC, ComponentLink2Description=https://datasheet.octopart.com:443/GRM1555C1H221JA01D-Murata-datasheet-62320221.pdf?src-supplier=element14+APAC, ComponentLink2URL=https://datasheet.octopart.com:443/GRM1555C1H221JA01D-Murata-datasheet-62320221.pdf?src-supplier=element14+APAC, ComponentLink3Description=https://datasheet.octopart.com:443/GRM1555C1H221JA01D-Murata-datasheet-165579666.pdf?src-supplier=TME, ComponentLink3URL=https://datasheet.octopart.com:443/GRM1555C1H221JA01D-Murata-datasheet-165579666.pdf?src-supplier=TME, ComponentLink4Description=https://datasheet.octopart.com:443/GRM1555C1H221JA01D-Murata-datasheet-59876780.pdf?src-supplier=TME, ComponentLink4URL=https://datasheet.octopart.com:443/GRM1555C1H221JA01D-Murata-datasheet-59876780.pdf?src-supplier=TME, ComponentLink5Description=https://datasheet.octopart.com:443/GRM1555C1H221JA01D-Murata-datasheet-141266224.pdf?src-supplier=Ciiva, ComponentLink5URL=https://datasheet.octopart.com:443/GRM1555C1H221JA01D-Murata-datasheet-141266224.pdf?src-supplier=Ciiva, ComponentLink6Description=https://datasheet.octopart.com:443/GRM1555C1H221JA01D-Murata-datasheet-140681357.pdf?src-supplier=Ciiva, ComponentLink6URL=https://datasheet.octopart.com:443/GRM1555C1H221JA01D-Murata-datasheet-140681357.pdf?src-supplier=Ciiva, ComponentLink7Description=https://datasheet.octopart.com:443/GRM1555C1H221JA01D-Murata-datasheet-138739519.pdf?src-supplier=Ciiva, ComponentLink7URL=https://datasheet.octopart.com:443/GRM1555C1H221JA01D-Murata-datasheet-138739519.pdf?src-supplier=Ciiva, ComponentLink8Description=https://datasheet.octopart.com:443/GRM1555C1H221JA01D-Murata-datasheet-120101189.pdf?src-supplier=Megastar, ComponentLink8URL=https://datasheet.octopart.com:443/GRM1555C1H221JA01D-Murata-datasheet-120101189.pdf?src-supplier=Megastar, ComponentLink9Description=https://datasheet.octopart.com:443/GRM1555C1H221JA01D-Murata-datasheet-22122223.pdf?src-supplier=Future+Electronics, ComponentLink9URL=https://datasheet.octopart.com:443/GRM1555C1H221JA01D-Murata-datasheet-22122223.pdf?src-supplier=Future+Electronics, ComponentLink10Description=https://datasheet.octopart.com:443/GRM1555C1H221JA01D-Murata-datasheet-12510170.pdf?src-supplier=Future+Electronics, ComponentLink10URL=https://datasheet.octopart.com:443/GRM1555C1H221JA01D-Murata-datasheet-12510170.pdf?src-supplier=Future+Electronics, ComponentLink11Description=https://datasheet.octopart.com:443/GRM1555C1H221JA01D-Murata-datasheet-8324201.pdf?src-supplier=Future+Electronics, ComponentLink11URL=https://datasheet.octopart.com:443/GRM1555C1H221JA01D-Murata-datasheet-8324201.pdf?src-supplier=Future+Electronics, ComponentLink12Description=https://datasheet.octopart.com:443/GRM1555C1H221JA01D-Murata-datasheet-552801.pdf?src-supplier=Future+Electronics, ComponentLink12URL=https://datasheet.octopart.com:443/GRM1555C1H221JA01D-Murata-datasheet-552801.pdf?src-supplier=Future+Electronics, ComponentLink13Description=https://datasheet.octopart.com:443/GRM1555C1H221JA01D-Murata-datasheet-44105895.pdf?src-supplier=Future+Electronics, ComponentLink13URL=https://datasheet.octopart.com:443/GRM1555C1H221JA01D-Murata-datasheet-44105895.pdf?src-supplier=Future+Electronics, ComponentLink14Description=https://datasheet.octopart.com/GRM1555C1H221JA01D-Murata-datasheet-12515295.pdf, ComponentLink14URL=https://datasheet.octopart.com/GRM1555C1H221JA01D-Murata-datasheet-12515295.pdf, ComponentLink15Description=https://datasheet.octopart.com/GRM1555C1H221JA01D-Murata-datasheet-12510076.pdf, ComponentLink15URL=https://datasheet.octopart.com/GRM1555C1H221JA01D-Murata-datasheet-12510076.pdf, ComponentLink16Description=https://datasheet.octopart.com/GRM1555C1H221JA01D-Murata-datasheet-11978611.pdf, ComponentLink16URL=https://datasheet.octopart.com/GRM1555C1H221JA01D-Murata-datasheet-11978611.pdf, ComponentLink17Description=https://datasheet.octopart.com/GRM1555C1H221JA01D-Murata-datasheet-10025737.pdf, ComponentLink17URL=https://datasheet.octopart.com/GRM1555C1H221JA01D-Murata-datasheet-10025737.pdf, ComponentLink18Description=https://datasheet.octopart.com/GRM1555C1H221JA01D-Murata-datasheet-8819587.pdf, ComponentLink18URL=https://datasheet.octopart.com/GRM1555C1H221JA01D-Murata-datasheet-8819587.pdf, ComponentLink19Description=https://datasheet.octopart.com/GRM1555C1H221JA01D-Murata-datasheet-12544403.pdf, ComponentLink19URL=https://datasheet.octopart.com/GRM1555C1H221JA01D-Murata-datasheet-12544403.pdf, ComponentLink20Description=https://datasheet.octopart.com:443/GRM1555C1H221JA01D-Murata-datasheet-11841991.pdf?src-supplier=Arrow+Electronics, ComponentLink20URL=https://datasheet.octopart.com:443/GRM1555C1H221JA01D-Murata-datasheet-11841991.pdf?src-supplier=Arrow+Electronics, ComponentLink21Description=https://datasheet.octopart.com:443/GRM1555C1H221JA01D-Murata-datasheet-7558141.pdf?src-supplier=Jameco, ComponentLink21URL=https://datasheet.octopart.com:443/GRM1555C1H221JA01D-Murata-datasheet-7558141.pdf?src-supplier=Jameco, ComponentLink22Description=https://datasheet.octopart.com:443/GRM1555C1H221JA01D-Murata-datasheet-148211.pdf?src-supplier=Garrett, ComponentLink22URL=https://datasheet.octopart.com:443/GRM1555C1H221JA01D-Murata-datasheet-148211.pdf?src-supplier=Garrett, ComponentLink23Description=https://datasheet.octopart.com:443/GRM1555C1H221JA01D-Murata-datasheet-102.pdf?src-supplier=DigiKey, ComponentLink23URL=https://datasheet.octopart.com:443/GRM1555C1H221JA01D-Murata-datasheet-102.pdf?src-supplier=DigiKey, ComponentLink24Description=https://datasheet.octopart.com:443/GRM1555C1H221JA01D-Murata-datasheet-514334.pdf?src-supplier=Farnell, ComponentLink24URL=https://datasheet.octopart.com:443/GRM1555C1H221JA01D-Murata-datasheet-514334.pdf?src-supplier=Farnell, ComponentLink25Description=http://sigma.octopart.com:80/reach_statement/Murata-company-16.pdf?src-supplier=Compliance+Statements, ComponentLink25URL=http://sigma.octopart.com:80/reach_statement/Murata-company-16.pdf?src-supplier=Compliance+Statements, Depth=500µm, Height=500µm, Lead Free="Lead Free", Length=1mm, Lifecycle Status=NRND, Material=Ceramic, Mounting Technology="Surface Mount", Number of Terminals=2, Packaging="Cut Tape", Pins=2, Pricing="1=0,1, 10=0,03, 50=0,0202, 100=0,0172, 500=0,0122, 1000=0,01067, 2500=0,00906, 5000=0,00809 (USD)", Radiation Hardening=No, REACH SVHC=Yes, RoHS=Compliant, Schedule B="8532240020, 8532240020|8532240020, 8532240020|8532240020|8532240020, 8532240020|8532240020|8532240020|8532240020", Stock=327235, Supplier=DigiKey, Termination=SMD/SMT, Thickness=500µm, Voltage Rating=50V, Voltage Rating (DC)=50V, Width=500µm
D1: "ESD Suppressor Diode TVS Bi-Dir 5V 10Vc 18-Pin UDFN EP T/R", Breakdown Voltage=6.7V, Clamping Voltage=10V, LCSC Part=C260424, Leakage Current=1µA, Manufacturer=onsemi, Manufacturer Lifecycle Status=ACTIVE, Max Operating Temperature=125°C, Max Surge Current=16A, Min Breakdown Voltage=5.5V, Min Operating Temperature=-55°C, Operating Supply Voltage=5V, Peak Pulse Current=1A, Power Line Protection=No, Supplier Part Number=ESD7008MUTAGOSCT-ND, Category="TVS Diodes", China RoHS=Compliant, ComponentLink1Description=https://datasheet.octopart.com:443/ESD7008MUTAG-onsemi-datasheet-170667543.pdf?src-supplier=Farnell, ComponentLink1URL=https://datasheet.octopart.com:443/ESD7008MUTAG-onsemi-datasheet-170667543.pdf?src-supplier=Farnell, ComponentLink2Description=https://datasheet.octopart.com:443/ESD7008MUTAG-ON-Semiconductor-datasheet-139009825.pdf?src-supplier=Upverter, ComponentLink2URL=https://datasheet.octopart.com:443/ESD7008MUTAG-ON-Semiconductor-datasheet-139009825.pdf?src-supplier=Upverter, ComponentLink3Description=https://datasheet.octopart.com:443/ESD7008MUTAG-ON-Semiconductor-datasheet-11791752.pdf?src-supplier=HQonline, ComponentLink3URL=https://datasheet.octopart.com:443/ESD7008MUTAG-ON-Semiconductor-datasheet-11791752.pdf?src-supplier=HQonline, ComponentLink4Description=https://datasheet.octopart.com:443/ESD7008MUTAG-ON-Semiconductor-datasheet-78758468.pdf?src-supplier=Newark, ComponentLink4URL=https://datasheet.octopart.com:443/ESD7008MUTAG-ON-Semiconductor-datasheet-78758468.pdf?src-supplier=Newark, ComponentLink5Description=https://datasheet.octopart.com:443/ESD7008MUTAG-onsemi-datasheet-164731278.pdf?src-supplier=Newchip+Electronics+Limited, ComponentLink5URL=https://datasheet.octopart.com:443/ESD7008MUTAG-onsemi-datasheet-164731278.pdf?src-supplier=Newchip+Electronics+Limited, ComponentLink6Description=https://datasheet.octopart.com:443/ESD7008MUTAG-ON-Semiconductor-datasheet-110755763.pdf?src-supplier=RS+(Formerly+Allied+Electronics), ComponentLink6URL=https://datasheet.octopart.com:443/ESD7008MUTAG-ON-Semiconductor-datasheet-110755763.pdf?src-supplier=RS+(Formerly+Allied+Electronics), ComponentLink7Description=http://sigma.octopart.com:80/15540786/rohs_certificate/ON-Semiconductor-ESD7008MUTAG.pdf?src-supplier=Compliance+Statements, ComponentLink7URL=http://sigma.octopart.com:80/15540786/rohs_certificate/ON-Semiconductor-ESD7008MUTAG.pdf?src-supplier=Compliance+Statements, ComponentLink8Description=http://sigma.octopart.com:80/15676147/materials_sheet/ON-Semiconductor-ESD7008MUTAG.csv?src-supplier=Compliance+Statements, ComponentLink8URL=http://sigma.octopart.com:80/15676147/materials_sheet/ON-Semiconductor-ESD7008MUTAG.csv?src-supplier=Compliance+Statements, ComponentLink9Description=http://sigma.octopart.com:80/150607531/rohs_statement/ON-Semiconductor-ESD7008MUTAG.pdf?src-supplier=Compliance+Statements, ComponentLink9URL=http://sigma.octopart.com:80/150607531/rohs_statement/ON-Semiconductor-ESD7008MUTAG.pdf?src-supplier=Compliance+Statements, ComponentLink10Description=http://sigma.octopart.com:80/reach_statement/ON-Semiconductor-company-79.pdf?src-supplier=Compliance+Statements, ComponentLink10URL=http://sigma.octopart.com:80/reach_statement/ON-Semiconductor-company-79.pdf?src-supplier=Compliance+Statements, ComponentLink11Description=https://octopart.com:443/opatz8j6/c1?t=eJPUGHskUCjWHzRTcCm9FTuNwW_60uC7xxrGvBqXql9RnIplMsaR7f0ybKxS61_50tAtnBcg_z153n0-Evpu3YTz85Kll6SF8V-h7K1wBd-17R9sTn-om2PG0j3Sjoq31y7q7K-9QtPe93rM_m7vEIYkWl-4MQIXdG-nV4H_6jVia_KlVCkJQyYlBJYsWvAOx_FLm-IGCtyREI8XJlWZ68jDJJbigHVX74egp1OqwDe75zTnjVBkXh5dqnPEFdA-8RJSMjNITdpQEPozHnXrrDsNghMWrK-CSdee0nt_KACcwH1m7tJAXfei7WALMw1AbVU1NJwwCPjEhcaz1EOQMJDUxszsgKGf9y02UffTnA&src-supplier=Compliance+Statements, ComponentLink11URL=https://octopart.com:443/opatz8j6/c1?t=eJPUGHskUCjWHzRTcCm9FTuNwW_60uC7xxrGvBqXql9RnIplMsaR7f0ybKxS61_50tAtnBcg_z153n0-Evpu3YTz85Kll6SF8V-h7K1wBd-17R9sTn-om2PG0j3Sjoq31y7q7K-9QtPe93rM_m7vEIYkWl-4MQIXdG-nV4H_6jVia_KlVCkJQyYlBJYsWvAOx_FLm-IGCtyREI8XJlWZ68jDJJbigHVX74egp1OqwDe75zTnjVBkXh5dqnPEFdA-8RJSMjNITdpQEPozHnXrrDsNghMWrK-CSdee0nt_KACcwH1m7tJAXfei7WALMw1AbVU1NJwwCPjEhcaz1EOQMJDUxszsgKGf9y02UffTnA&src-supplier=Compliance+Statements, ComponentLink12Description=https://octopart.com:443/opatz8j6/c1?t=Q--1XnQq8nn3HDM6-oyBDP4Hk7CmCu85E0c0zGkWhhG76gQgF4Yed-BocdSuHyotIN3eHIvp2O44DitdkCkAWViF-D3tTxeRAIb-rBAsSALMoMt_pJtCBpLoxrqcGsb9kzrJKvkIpu1gkwdl0i8qiXdRDT0nq3nfP5o8KfYlhgwgATSjyuViSxFBjnVUgPMeeGT2yKt-NDtQjN3KL9BZnI-kF8UY5x2V1AoQg_4vTUYzD4KXGaHyCyS1cFyDfHfhMRFgWpRfN62WymcPL0SnYenywxhRAFGm-Mz5q4Bw2yWAg-vHjgqNfRM_uh_L4ryMOMaY6pMncDyUGJphmeZ_jrqZ7snqyzMqxFuGLQmuOeA&src-supplier=Compliance+Statements, ComponentLink12URL=https://octopart.com:443/opatz8j6/c1?t=Q--1XnQq8nn3HDM6-oyBDP4Hk7CmCu85E0c0zGkWhhG76gQgF4Yed-BocdSuHyotIN3eHIvp2O44DitdkCkAWViF-D3tTxeRAIb-rBAsSALMoMt_pJtCBpLoxrqcGsb9kzrJKvkIpu1gkwdl0i8qiXdRDT0nq3nfP5o8KfYlhgwgATSjyuViSxFBjnVUgPMeeGT2yKt-NDtQjN3KL9BZnI-kF8UY5x2V1AoQg_4vTUYzD4KXGaHyCyS1cFyDfHfhMRFgWpRfN62WymcPL0SnYenywxhRAFGm-Mz5q4Bw2yWAg-vHjgqNfRM_uh_L4ryMOMaY6pMncDyUGJphmeZ_jrqZ7snqyzMqxFuGLQmuOeA&src-supplier=Compliance+Statements, Composition=Zener, Contact Plating=Tin, Country of Origin=Malaysia, Depth=1.5mm, Direction=Bidirectional, ESD Protection=Yes, Export Control Classification Number (ECCN) Code=EAR99, Halogen Free="Halogen Free", Harmonized Tariff Schedule (HTS) Code=8541.10.00.50, Height=500µm, Introduction Date=2011-08-22, Lead Free="Lead Free", Length=5.5mm, Lifecycle Status=Production, Manufacturer Part Number=ESD7008MUTAG, Max Reverse Leakage Current=1µA, Number of Bidirectional Channels=8, Number of Channels=8, Number of Elements=8, Number of Lines=8, Number of Terminals=18, Packaging="Tape and Reel", Peak Reverse Current=1µA, Pins=18, Polarity=Unidirectional, Pricing="1=1,66, 10=1,048, 100=0,6981, 500=0,54792, 1000=0,49959 (USD)", Radiation Hardening=No, REACH SVHC=Yes, Reverse Standoff Voltage=5V, RoHS=Compliant, Schedule B=8536300000|8536300000|8536300000|8536300000|8536300000|8536300000|8536300000|8536300000|8536300000|8536300000|8536300000|8536300000|8536300000|8536300000|8536300000|8536300000|8536300000|8536300000|8536300000|8536300000|8536300000|8536300000|8536300000|85, Supplier=DigiKey, Termination=SMD/SMT, Width=1.5mm, Working Voltage=5V
J1: "Modular Connectors / Ethernet Connectors MXMag GIG 8CORE RJ45 W/ LEDs GRN/YLW RA", Contact Resistance=5mΩ, Current Rating=500mA, Dielectric Material="Liquid Crystal Polymer", Insulation Color=Black, Insulation Resistance=500MΩ, LCSC Part=C6377799, Manufacturer=Molex, Manufacturer Lifecycle Status=ACTIVE, Max Operating Temperature=70°C, Min Operating Temperature=0°C, Supplier Part Number=WM17615-ND, Voltage Rating=125V, Category="Modular / Ethernet Connectors", China RoHS=Compliant, ComponentLink1Description=https://datasheet.octopart.com:443/936263006-Molex-datasheet-148499619.pdf?src-supplier=Molex, ComponentLink1URL=https://datasheet.octopart.com:443/936263006-Molex-datasheet-148499619.pdf?src-supplier=Molex, ComponentLink2Description=https://datasheet.octopart.com:443/93626-3006-Molex-datasheet-134576264.pdf?src-supplier=TME, ComponentLink2URL=https://datasheet.octopart.com:443/93626-3006-Molex-datasheet-134576264.pdf?src-supplier=TME, ComponentLink3Description=https://datasheet.octopart.com:443/93626-3006-Molex-datasheet-192977032.pdf?src-supplier=Farnell, ComponentLink3URL=https://datasheet.octopart.com:443/93626-3006-Molex-datasheet-192977032.pdf?src-supplier=Farnell, ComponentLink4Description=https://datasheet.octopart.com:443/93626-3006-Molex-datasheet-101610786.pdf?src-supplier=Farnell, ComponentLink4URL=https://datasheet.octopart.com:443/93626-3006-Molex-datasheet-101610786.pdf?src-supplier=Farnell, ComponentLink5Description=http://sigma.octopart.com:80/reach_statement/Molex-company-74.pdf?src-supplier=Compliance+Statements, ComponentLink5URL=http://sigma.octopart.com:80/reach_statement/Molex-company-74.pdf?src-supplier=Compliance+Statements, ComponentLink6Description=http://sigma.octopart.com:80/rohs_statement/Molex-company-73.pdf?src-supplier=Compliance+Statements, ComponentLink6URL=http://sigma.octopart.com:80/rohs_statement/Molex-company-73.pdf?src-supplier=Compliance+Statements, ComponentLink7Description=http://sigma.octopart.com:80/conflict_mineral_statement/Molex-company-72.pdf?src-supplier=Compliance+Statements, ComponentLink7URL=http://sigma.octopart.com:80/conflict_mineral_statement/Molex-company-72.pdf?src-supplier=Compliance+Statements, Contact Material="Gold, Nickel", Country of Origin=IE, Depth=21.4mm, Export Control Classification Number (ECCN) Code=EAR99, Gender=Female, Harmonized Tariff Schedule (HTS) Code=8536.69.40.30, Height=15.4mm, Introduction Date=2017-04-25, Length=21.4mm, Lifecycle Status=Production, Manufacturer Part Number=93626-3006, Number of Contacts=10, Number of Ports=1, Number of Positions=8, Number of Rows=2, Orientation="Right Angle", Pins=8, Plating=Tin, Pricing="1=9,7, 10=8,241, 25=7,724, 56=7,29679, 112=6,94848, 280=6,51361, 504=6,24925, 1008=5,95129 (USD)", REACH SVHC=Yes, RoHS=Compliant, Row Spacing=2.54mm, Shell Finish=Nickel, Shell Material=Brass, Supplier=DigiKey, Terminal Pitch=2.54mm, Termination=Solder
J2: "USB Connector, 4 Contact(s), Female, Right Angle, Solder Terminal, Receptacle", LCSC Part=C5429210, Manufacturer=Amphenol, Supplier Part Number=GSB4211311WEU-ND, Category="USB Connectors", ComponentLink1Description=https://datasheet.octopart.com:443/GSB4211311WEU-Amphenol-datasheet-182249119.pdf?src-supplier=IHS, ComponentLink1URL=https://datasheet.octopart.com:443/GSB4211311WEU-Amphenol-datasheet-182249119.pdf?src-supplier=IHS, ComponentLink2Description=https://datasheet.octopart.com:443/GSB4211311WEU-Amphenol-ICC---FCI-datasheet-154727458.pdf?src-supplier=Master+Electronics, ComponentLink2URL=https://datasheet.octopart.com:443/GSB4211311WEU-Amphenol-ICC---FCI-datasheet-154727458.pdf?src-supplier=Master+Electronics, ComponentLink3Description=https://datasheet.octopart.com:443/GSB4211311WEU-Amphenol-datasheet-62278742.pdf?src-supplier=Electro+Sonic, ComponentLink3URL=https://datasheet.octopart.com:443/GSB4211311WEU-Amphenol-datasheet-62278742.pdf?src-supplier=Electro+Sonic, Connector Type=USB, Export Control Classification Number (ECCN) Code=EAR99, Gender=Female, Harmonized Tariff Schedule (HTS) Code=8536.69.40.30, Introduction Date=2014-08-04, Lifecycle Status=Production, Manufacturer Part Number=GSB4211311WEU, Mounting Technology="Through Hole", Number of Contacts=9, Number of Positions=4, Orientation="Right Angle", Pricing="1=1,8, 10=1,533, 25=1,4368, 50=1,368, 100=1,3026, 250=1,22092, 500=1,16264, 1500=1,07593, 3000=1,0246 (USD)", REACH SVHC=Yes, RoHS=Compliant, Shell Finish=Nickel, Stock=5889, Supplier=DigiKey, Termination=Solder
L1 L2: library part AOTA-B252010S4R7MT, "Inductor Power Mini Molded/Shielded Wirewound 4.7uH 20% 1MHz 1.6A 0.136Ohm DCR 1008", Case/Package=1008, DC Resistance (DCR)=136mΩ, LCSC Part=C24991964, Manufacturer=Abracon, Max Current Rating=1.6A, Max Operating Temperature=125°C, Min Operating Temperature=-40°C, Self Resonant Frequency=19MHz, Supplier Part Number=535-AOTA-B252010S4R7MTCT-ND, Test Frequency=1MHz, Tolerance=20%, Category="Fixed Inductors", China RoHS=Compliant, ComponentLink1Description=https://datasheet.octopart.com:443/AOTA-B252010S4R7MT-Abracon-datasheet-182207527.pdf?src-supplier=Master+Electronics, ComponentLink1URL=https://datasheet.octopart.com:443/AOTA-B252010S4R7MT-Abracon-datasheet-182207527.pdf?src-supplier=Master+Electronics, ComponentLink2Description=http://sigma.octopart.com:80/conflict_mineral_statement/Abracon-company-27.pdf?src-supplier=Compliance+Statements, ComponentLink2URL=http://sigma.octopart.com:80/conflict_mineral_statement/Abracon-company-27.pdf?src-supplier=Compliance+Statements, Export Control Classification Number (ECCN) Code=EAR99, Harmonized Tariff Schedule (HTS) Code=8504.50.80.00, Height=1mm, Introduction Date=2023-08-01, Length=2.5mm, Lifecycle Status=Production, Manufacturer Part Number=AOTA-B252010S4R7MT, Number of Circuits=1, Number of Terminals=2, Pricing="1=0,19, 10=0,157, 100=0,129, 1000=0,10609 (USD)", REACH SVHC=Yes, RoHS=Compliant, Shielding=Shielded, Stock=7663, Supplier=DigiKey, Width=2mm